# EAGLE board Occupancy PCB (EAGLE 7.5.0)
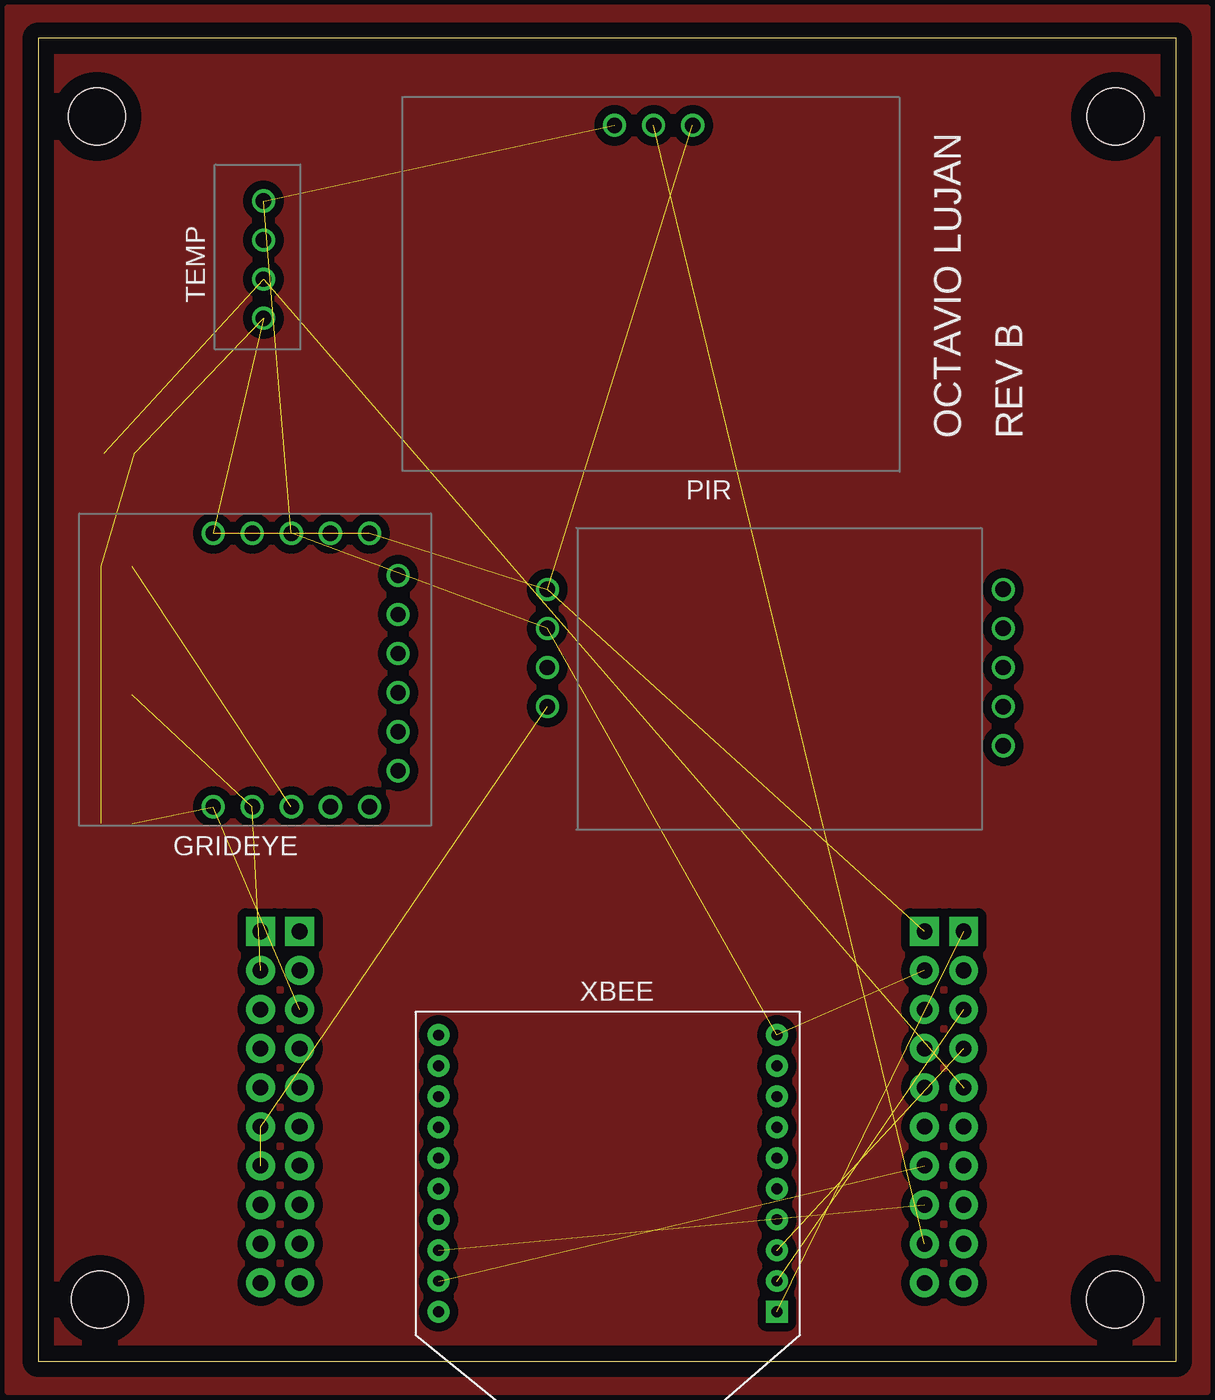
[diagram p0: board, top side]
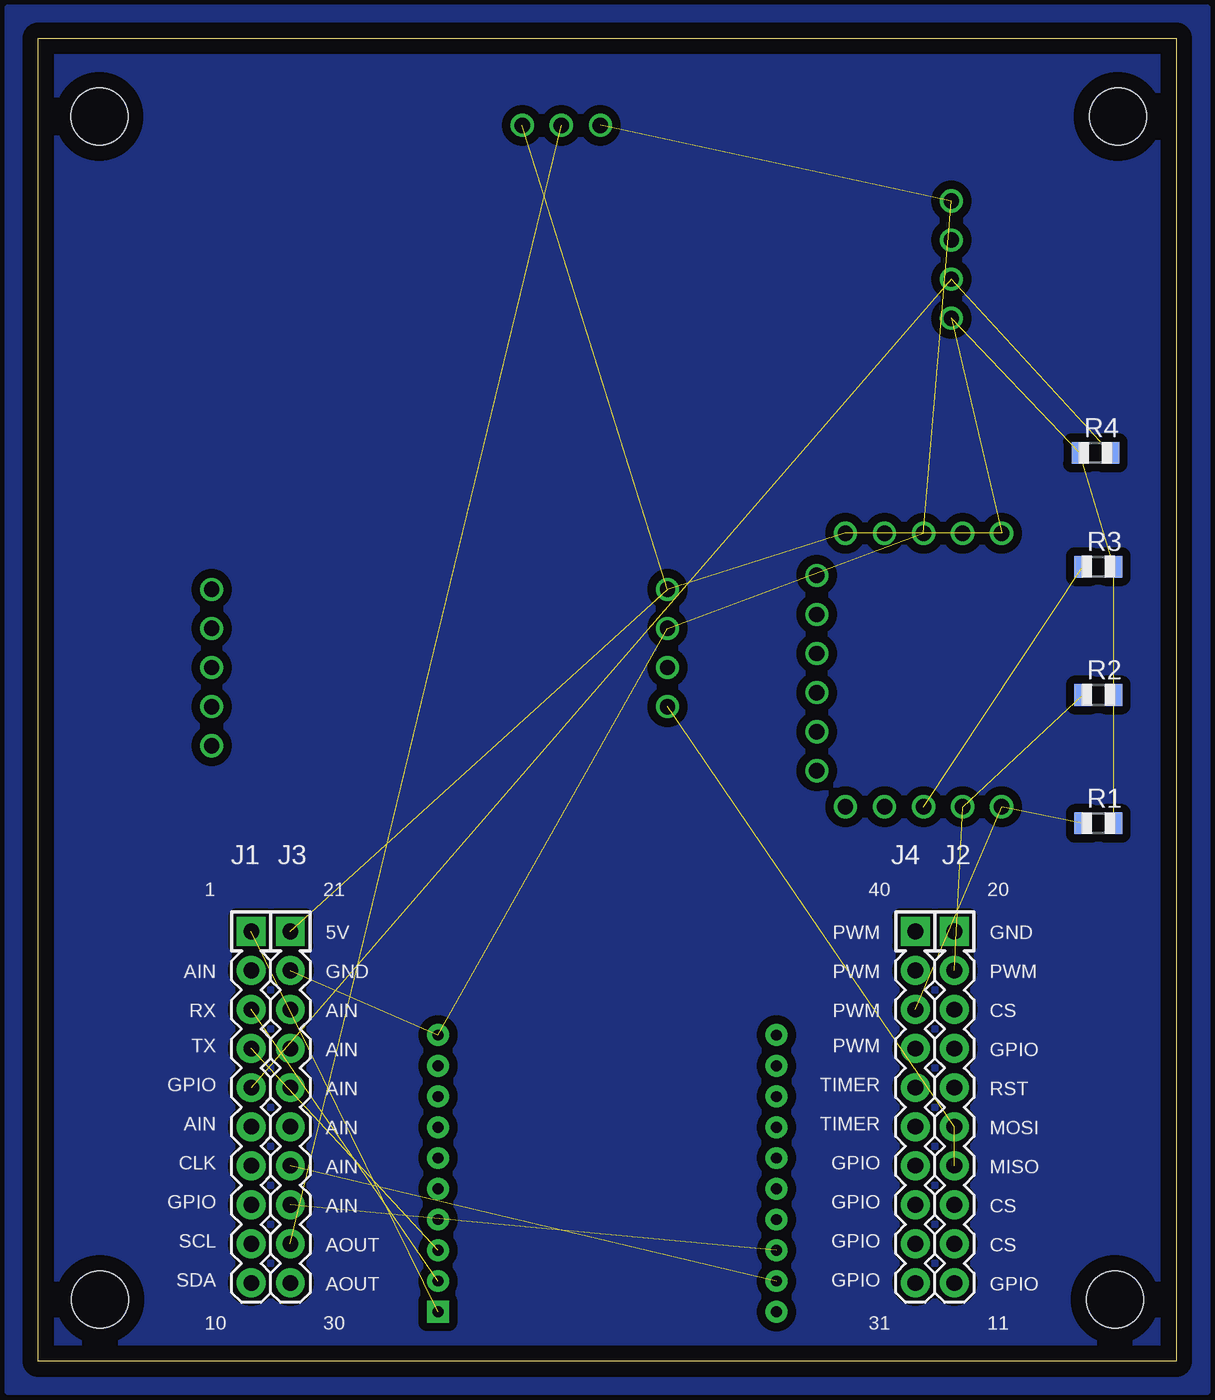
[diagram p1: board, bottom side, seen from below]

Size 74 x 86 mm. Coordinates in mm from the lower left corner, seen from the top.
Outline: 0,0 74,0 74,86 0,86 0,0
Copper layers (1*16): Top 0.035mm / dielectric 1.5mm / Bottom 0.035mm
Design rules "default": minimum track width 10mil, minimum drill 24mil, track to track 8mil, track to pad 8mil, pad to pad 8mil, via to via 8mil, smd to smd 8mil, copper to edge 40mil, drill to drill 8mil, minimum pad ring 10mil, minimum via ring 8mil, stop-mask expansion 4mil, vias tented up to drill 0mil, thermal gap 10mil
Net classes: 0 default: width 0.305 mm, drill 0.508 mm, clearance 0.559 mm; 1 VCC: width 0.559 mm, drill 0.508 mm, clearance 0.457 mm; 2 GND: width 0.508 mm, drill 0.508 mm, clearance 0.457 mm
Holes 3.7 mm at 3.81,80.93 70.04,80.93 4,4 70,4

## Footprints (pad centres in the part's own frame; a part is rotated, then mirrored left to right if it is on the bottom)
SENSEAIR-S8-DIP = drill 1: 1 -18.055,5.185; 2 -18.055,2.645; 3 -18.055,0.105; 4 -18.055,-2.435; 5 11.585,5.185; 6 11.585,2.645; 7 11.585,0.105; 8 11.585,-2.435; 9 11.585,-4.975
GRID-EYE-DIP = drill 1: GND 0.985,-8.645; INT 0.985,9.135; NA 3.525,-8.645; NA0 -4.095,9.135; NA1 -1.555,9.135; NA2 -1.555,-8.645; NA3 -5.955,-5.905; NA4 -5.955,-3.365; NA5 -5.955,-0.825; NA6 -5.955,1.715; NA7 -5.955,4.255; NA8 -5.955,6.795; SCL 3.525,9.135; SDA 6.065,9.135; VCC -4.095,-8.645; VCC2 6.065,-8.645
4X10-BOOSTERPACK = drill 1.016 pad 1.88 square: 1 0,10.16; 20 45.72,10.16; 21 2.54,10.16; 40 43.18,10.16 | drill 1.016 pad 1.88: 2 0,7.62; 3 0,5.08; 4 0,2.54; 5 0,0; 6 0,-2.54; 7 0,-5.08; 8 0,-7.62; 9 0,-10.16; 10 0,-12.7; 11 45.72,-12.7; 12 45.72,-10.16; 13 45.72,-7.62; 14 45.72,-5.08; 15 45.72,-2.54; 16 45.72,0; 17 45.72,2.54; 18 45.72,5.08; 19 45.72,7.62; 22 2.54,7.62; 23 2.54,5.08; 24 2.54,2.54; 25 2.54,0; 26 2.54,-2.54; 27 2.54,-5.08; 28 2.54,-7.62; 29 2.54,-10.16; 30 2.54,-12.7; 31 43.18,-12.7; 32 43.18,-10.16; 33 43.18,-7.62; 34 43.18,-5.08; 35 43.18,-2.54; 36 43.18,0; 37 43.18,2.54; 38 43.18,5.08; 39 43.18,7.62
PIR-DIP = drill 1: GND 2.54,-10.35; OUT 0,-10.35; VCC -2.54,-10.35
R0805 = smd 1.1 x 1.4: 1 -1,0; 2 1,0
DHT11-DIP = drill 1: D_OUT -1.651,-0.635; GND 3.429,-0.635; NA 0.889,-0.635; VCC -4.191,-0.635
XBEE = drill 0.7 pad 1.422 square: 1 -11,5.5 | drill 0.7 pad 1.422: 2 -11,3.5; 3 -11,1.5; 4 -11,-0.5; 5 -11,-2.5; 6 -11,-4.5; 7 -11,-6.5; 8 -11,-8.5; 9 -11,-10.5; 10 -11,-12.5; 11 11,-12.5; 12 11,-10.5; 13 11,-8.5; 14 11,-6.5; 15 11,-4.5; 16 11,-2.5; 17 11,-0.5; 18 11,1.5; 19 11,3.5; 20 11,5.5

## Placement (x,y rotation side)
CO2  SENSEAIR-S8-DIP  [SENSEAIR-S8-DIP]  51.15,44.99 0 top
GRIDEYE  GRID-EYE-DIP  [GRID-EYE-DIP]  17.43,45.18 180 top
LAUNCHPAD  [4X10-BOOSTERPACK]  60.16,17.78 0 bottom
PIR  PIR-DIP  [PIR-DIP]  40,70 180 top
R1  4.7K  [R0805]  5.08,34.96 0 bottom
R2  4.7K  [R0805]  5.08,43.31 0 bottom
R3  4.7K  [R0805]  5.08,51.66 0 bottom
R4  4.7K  [R0805]  5.27,59.05 0 bottom
TEMP  DHT11-DIP  [DHT11-DIP]  14,72 90 top
XBEE  XBEE  [XBEE]  37.02,8.7 180 top

## Library data of the parts
CO2 GRIDEYE PIR TEMP = LUJAN
LAUNCHPAD = EAGLE_BoosterPack_Library
R1-R4 XBEE = adafruit

## Nets
GND: CO2.2 GRIDEYE.GND LAUNCHPAD.22 PIR.GND TEMP.GND XBEE.10
N$2: GRIDEYE.SDA LAUNCHPAD.38 R1.1
N$3: CO2.4 LAUNCHPAD.14 LAUNCHPAD.15
N$4: LAUNCHPAD.3 XBEE.2
N$5: LAUNCHPAD.4 XBEE.3
N$6: GRIDEYE.SCL LAUNCHPAD.19 R2.1
N$7: GRIDEYE.INT R3.1
N$8: LAUNCHPAD.5 R4.2 TEMP.D_OUT
N$10: LAUNCHPAD.27 XBEE.19
N$11: LAUNCHPAD.28 XBEE.18
N$12: LAUNCHPAD.29 PIR.OUT
VCC [VCC]: CO2.1 GRIDEYE.VCC GRIDEYE.VCC2 LAUNCHPAD.21 PIR.VCC R1.2 R2.2 R3.2 R4.1 TEMP.VCC
VCC3: LAUNCHPAD.1 XBEE.1

## Tracks (layer width: path | path; a pad name or v marks a point on that pad's centre or on a via)
GND  (5 unrouted)
N$1
  pour Top: -2,88 -2,-2 76,-2 76,88
N$2  (2 unrouted)
N$3  (2 unrouted)
N$4  (1 unrouted)
N$5  (1 unrouted)
N$6  (2 unrouted)
N$7  (1 unrouted)
N$8  (2 unrouted)
N$9
  pour Bottom: -2,88 -2,-2 76,-2 76,88
N$10  (1 unrouted)
N$11  (1 unrouted)
N$12  (1 unrouted)
VCC  (9 unrouted)
VCC3  (1 unrouted)

## Text on the board
tPlace: OCTAVIO LUJAN | REV B